# EAGLE board EWSII (EAGLE 9.3.1)
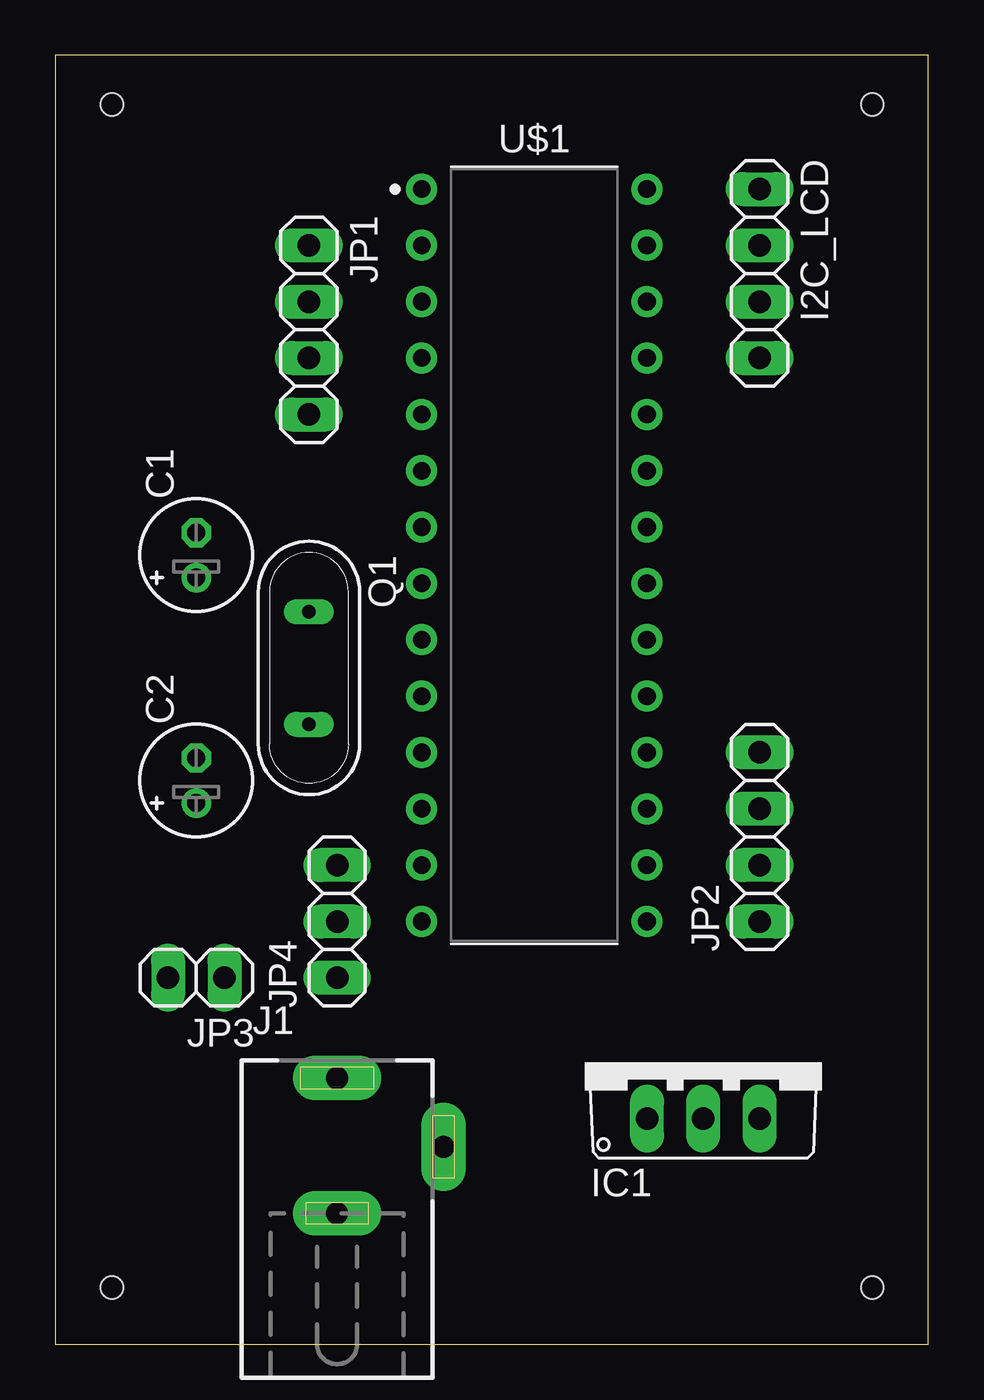
[diagram p0: board, top side]
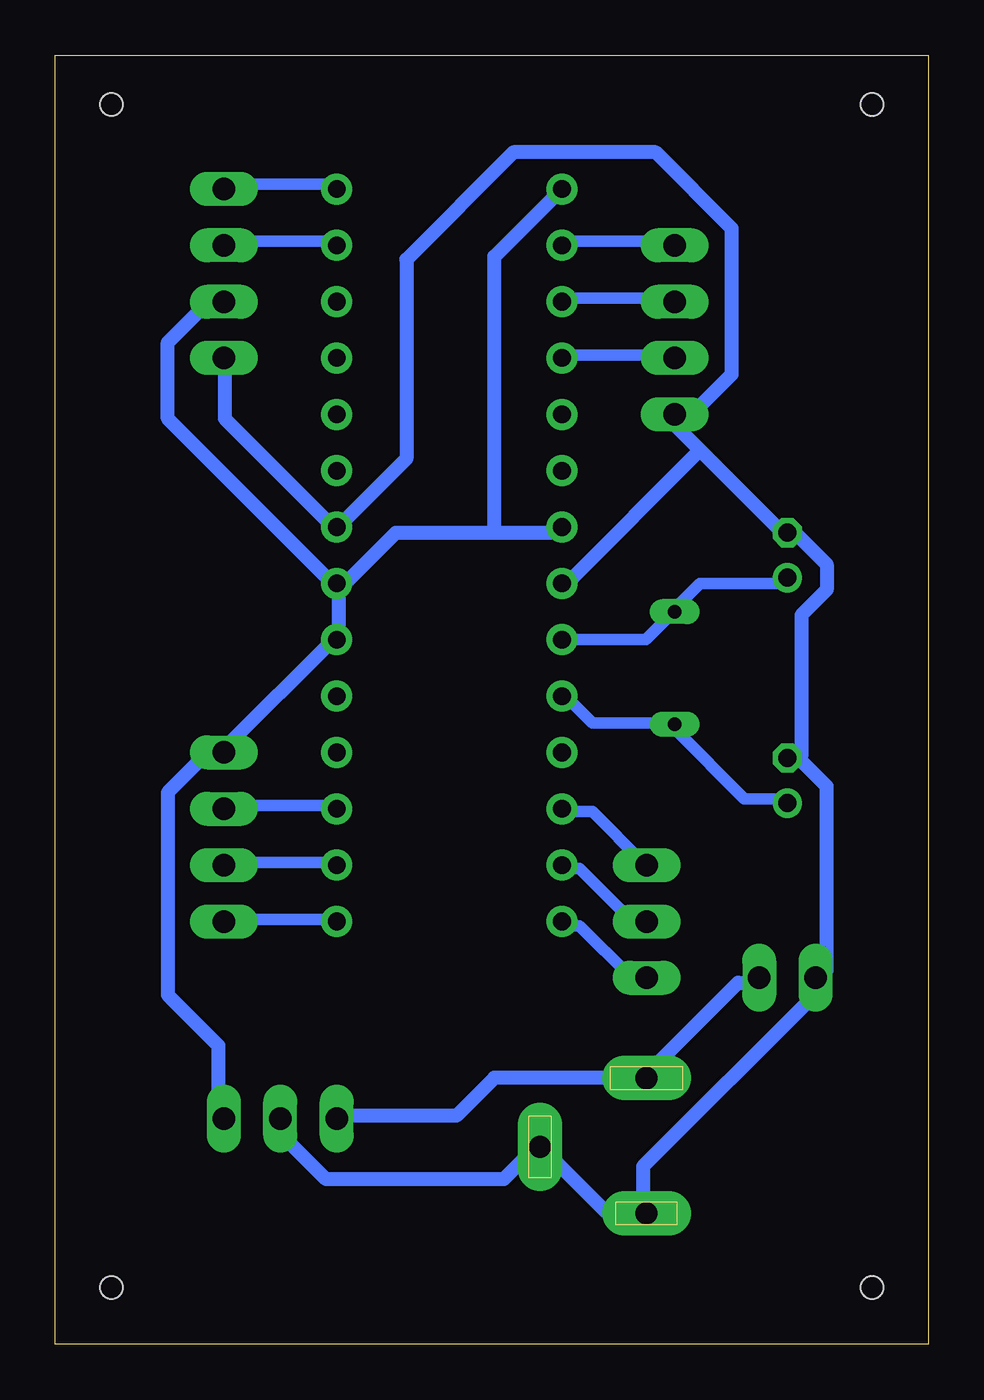
[diagram p1: board, bottom side, seen from below]

Size 39.35 x 58.09 mm. Coordinates in mm from the lower left corner, seen from the top.
Outline: 0,0 39.35,0 39.35,58.09 0,58.09 0,0
Copper layers (1*16): Top 0.035mm / dielectric 1.5mm / Bottom 0.035mm
Design rules "default": minimum track width 6mil, minimum drill 0.35mm, track to track 6mil, track to pad 6mil, pad to pad 6mil, via to via 6mil, smd to smd 6mil, copper to edge 40mil, drill to drill 6mil, minimum pad ring 10mil, minimum via ring 8mil, stop-mask expansion 4mil, vias tented up to drill 0mil, thermal gap 10mil
Net classes: 0 default: width 0.508 mm, drill 0.254 mm, clearance 0.635 mm; 1 power: width 0.635 mm, drill 0.254 mm, clearance 0.635 mm
Holes 1 mm at 2.54,55.88 36.83,55.88 36.83,2.54 2.54,2.54

## Footprints (pad centres in the part's own frame; a part is rotated, then mirrored left to right if it is on the bottom)
E2-5 = drill 0.813 pad 1.27: + -1.016,0 | drill 0.813 pad 1.27 octagon: - 1.016,0
1X04 = drill 1.016 long: 1 -3.81,0; 2 -1.27,0; 3 1.27,0; 4 3.81,0
TO220V = drill 1.016 long: 1 -2.54,-2.54; 2 0,-2.54; 3 2.54,-2.54
DCJ0202 = drill 1 pad 2 long: 1 0,3.1; 2 4.8,0; 3 0,-3
1X02 = drill 1.016 long: 1 -1.27,0; 2 1.27,0
1X03 = drill 1.016 long: 1 -2.54,0; 2 0,0; 3 2.54,0
QS = drill 0.61 long: 1 -2.54,0; 2 2.54,0
DIP1016W53P254L3466H457Q28B = drill 0.796 pad 1.396: 1 -5.08,16.51; 2 -5.08,13.97; 3 -5.08,11.43; 4 -5.08,8.89; 5 -5.08,6.35; 6 -5.08,3.81; 7 -5.08,1.27; 8 -5.08,-1.27; 9 -5.08,-3.81; 10 -5.08,-6.35; 11 -5.08,-8.89; 12 -5.08,-11.43; 13 -5.08,-13.97; 14 -5.08,-16.51; 15 5.08,-16.51; 16 5.08,-13.97; 17 5.08,-11.43; 18 5.08,-8.89; 19 5.08,-6.35; 20 5.08,-3.81; 21 5.08,-1.27; 22 5.08,1.27; 23 5.08,3.81; 24 5.08,6.35; 25 5.08,8.89; 26 5.08,11.43; 27 5.08,13.97; 28 5.08,16.51

## Placement (x,y rotation side)
C1  [E2-5]  6.35,35.56 90 top
C2  [E2-5]  6.35,25.4 90 top
I2C_LCD  [1X04]  31.75,48.26 270 top
IC1  7824TV  [TO220V]  29.21,12.7 0 top
J1  DCJ0202  [DCJ0202]  12.7,8.89 0 top
JP1  [1X04]  11.43,45.72 270 top
JP2  [1X04]  31.75,22.86 90 top
JP3  [1X02]  6.35,16.51 180 top
JP4  [1X03]  12.7,19.05 90 top
Q1  [QS]  11.43,30.48 270 top
U$1  ATMEGA328-DIP  [DIP1016W53P254L3466H457Q28B]  21.59,35.56 0 top

## Library data of the parts
C1 C2 = rcl; SPICEPREFIX: C
I2C_LCD JP1-JP4 = pinhead
IC1 = linear
J1 = con-jack; OC_FARNELL: unknown; OC_NEWARK: unknown
Q1 = special
U$1 = custom

## Nets
12: JP4.3 U$1.12
13: JP4.2 U$1.13
14: JP4.1 U$1.14
A4/SDA: I2C_LCD.2 U$1.27
A5/SCL: I2C_LCD.1 U$1.28
GND [power]: C1.- C2.- I2C_LCD.4 IC1.2 J1.2 J1.3 JP1.4 JP3.2 U$1.8 U$1.22
N$1: U$1.19
N$2: U$1.5
N$5: U$1.11
N$9: U$1.18
N$17: U$1.6
N$24: U$1.26
N$25: U$1.25
N$26: U$1.24
N$27: U$1.23
OE: JP1.3 U$1.4
OUT: JP2.3 U$1.17
POW [power]: IC1.1 J1.1 JP3.1
S0: JP1.1 U$1.2
S1: JP1.2 U$1.3
S2: JP2.2 U$1.16
S3: JP2.1 U$1.15
VCC [power]: I2C_LCD.3 IC1.3 JP2.4 U$1.1 U$1.7 U$1.20 U$1.21
XTAL1: C1.+ Q1.1 U$1.9
XTAL2: C2.+ Q1.2 U$1.10

## Tracks (layer width: path | path; a pad name or v marks a point on that pad's centre or on a via)
12
  Bottom 0.508: U$1.12 16.29,24 15.14,24 12.86,21.72 JP4.3
13
  Bottom 0.508: U$1.13 16.29,21.43 15.72,21.43 13.43,19.14 12.86,19.14 JP4.2
14
  Bottom 0.508: U$1.14 16.29,18.86 15.72,18.86 13.43,16.57 12.86,16.57 JP4.1
A4/SDA
  Bottom 0.508: U$1.27 26.86,49.72 31.72,49.72 I2C_LCD.2
A5/SCL
  Bottom 0.508: U$1.28 26.86,52.29 31.72,52.29 I2C_LCD.1
GND
  Bottom 0.635: IC1.2 29.15,10 29.15,9.43 27.15,7.43 19.14,7.43 17.72,8.86 J1.2 17.43,8.86 14.57,6 12.86,6 J1.3 12.86,6.29 12.86,8 5.14,15.72 5.14,16.29 JP3.2 4.86,16.57 4.57,16.86 4.57,25.15 5.71,26.29 6.29,26.29 C2.- 5.71,26.57 5.71,32.86 4.57,34 4.57,35.15 6.29,36.86 C1.- 6.57,36.58 10.29,40.29 | I2C_LCD.4 31.72,44.29 31.72,41.72 26.86,36.86 U$1.22 26.57,36.86 23.53,39.91 23.53,48.9 18.7,53.72 12.29,53.72 8.86,50.29 8.86,43.72 11.14,41.43 JP1.4 11.43,41.43 10.29,40.29 | 10.29,40.29 16.29,34.29 U$1.8
OE
  Bottom 0.508: U$1.4 16.29,44.58 11.43,44.58 JP1.3
OUT
  Bottom 0.508: U$1.17 26.86,24.29 31.72,24.29 JP2.3
POW
  Bottom 0.635: IC1.1 26.57,10.29 21.27,10.29 19.56,12 12.86,12 J1.1 12.57,12.29 8.57,16.29 7.71,16.29 JP3.1
S0
  Bottom 0.508: U$1.2 16.29,49.72 11.43,49.72 JP1.1
S1
  Bottom 0.508: U$1.3 16.29,47.15 11.43,47.15 JP1.2
S2
  Bottom 0.508: U$1.16 26.86,21.72 31.72,21.72 JP2.2
S3
  Bottom 0.508: U$1.15 26.86,19.14 31.72,19.14 JP2.1
VCC
  Bottom 0.635: IC1.3 32,10.29 32,13.46 34.29,15.75 34.29,24.86 32.58,26.57 32,26.57 JP2.4 31.72,26.86 26.86,31.72 U$1.20 26.57,32 26.57,34.29 U$1.21 | 19.56,36.58 24,36.58 26.29,34.29 U$1.21 | 19.56,36.58 16.57,36.58 U$1.7 | U$1.1 19.56,49.02 19.56,36.58 | I2C_LCD.3 32,46.86 32.58,46.86 34.29,45.15 34.29,41.72 26.86,34.29 U$1.21
XTAL1
  Bottom 0.508: U$1.9 12.73,31.75 11.62,32.86 11.43,32.86 Q1.1 11.43,33.15 10.29,34.29 6.57,34.29 C1.+
XTAL2
  Bottom 0.508: U$1.10 16.29,29.15 15.14,28 11.43,28 Q1.2 11.43,27.72 8.29,24.57 6.57,24.57 C2.+